# EAGLE board EC544 (EAGLE 9.6.2)
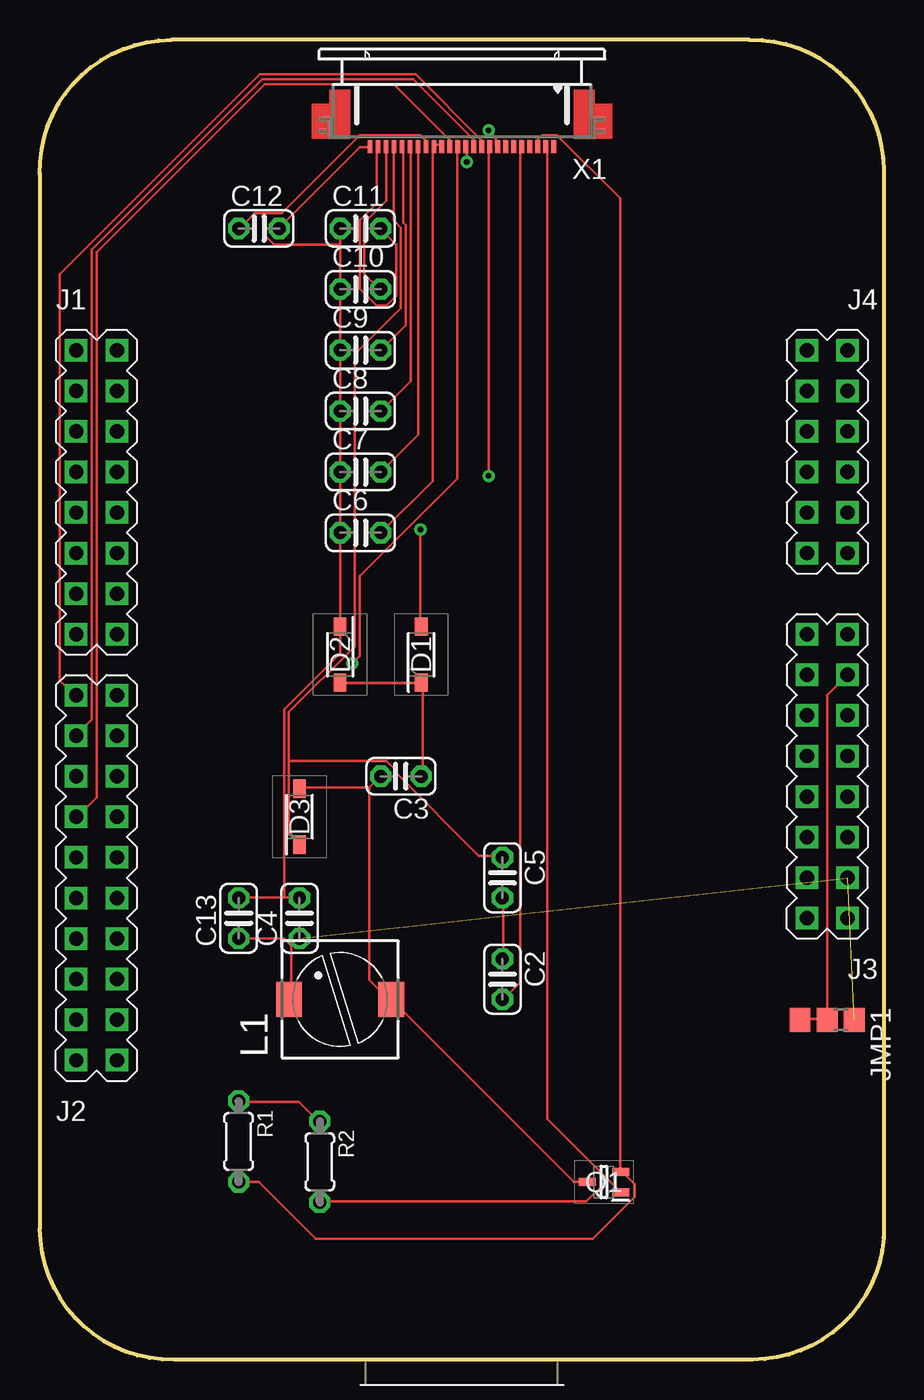
[diagram p0: board, top side]
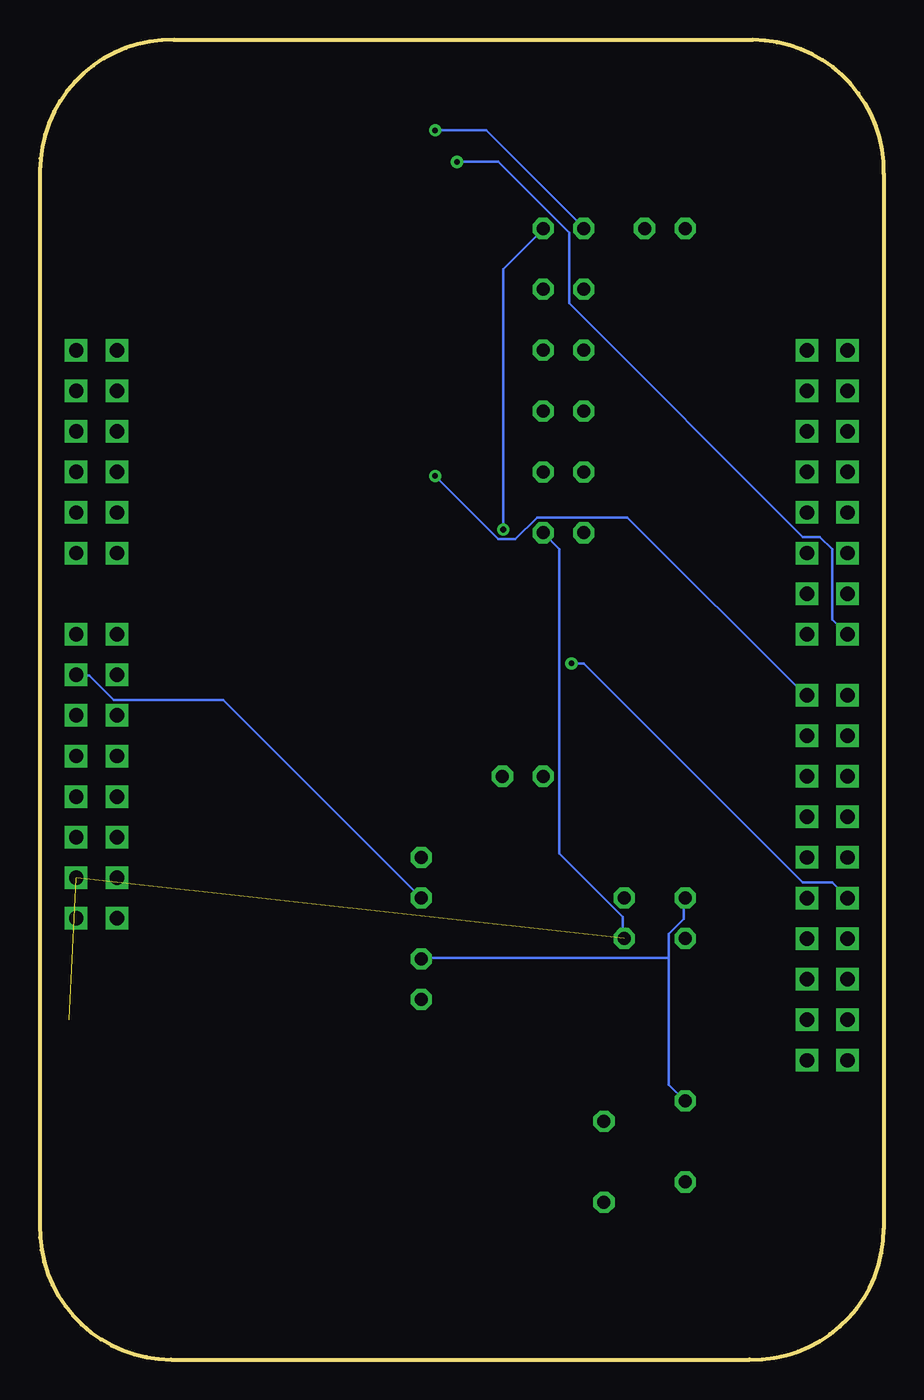
[diagram p1: board, bottom side, seen from below]

Size 52.8 x 82.6 mm. Coordinates in mm from the lower left corner, seen from the top.
Copper layers (1*16): Top 0.035mm / dielectric 1.5mm / Bottom 0.035mm
Design rules "default": minimum track width 6mil, minimum drill 0.35mm, track to track 6mil, track to pad 6mil, pad to pad 6mil, via to via 6mil, smd to smd 6mil, copper to edge 40mil, drill to drill 6mil, minimum pad ring 10mil, minimum via ring 8mil, stop-mask expansion 4mil, vias tented up to drill 0mil, thermal gap 10mil

## Footprints (pad centres in the part's own frame; a part is rotated, then mirrored left to right if it is on the bottom)
C025-024X044 = drill 0.813 octagon: 1 -1.27,0; 2 1.27,0
SOD3716X135N = smd 1.15 x 0.8: 1 -1.75,0; 2 1.75,0
FRDM_K64F = drill 0.9 square: J1.1 -21.59,17.78; J1.2 -24.13,17.78; J1.3 -21.59,15.24; J1.4 -24.13,15.24; J1.5 -21.59,12.7; J1.6 -24.13,12.7; J1.7 -21.59,10.16; J1.8 -24.13,10.16; J1.9 -21.59,7.62; J1.10 -24.13,7.62; J1.11 -21.59,5.08; J1.12 -24.13,5.08; J1.13 -21.59,2.54; J1.14 -24.13,2.54; J1.15 -21.59,0; J1.16 -24.13,0; J2.1 -21.59,-3.81; J2.2 -24.13,-3.81; J2.3 -21.59,-6.35; J2.4 -24.13,-6.35; J2.5 -21.59,-8.89; J2.6 -24.13,-8.89; J2.7 -21.59,-11.43; J2.8 -24.13,-11.43; J2.9 -21.59,-13.97; J2.10 -24.13,-13.97; J2.11 -21.59,-16.51; J2.12 -24.13,-16.51; J2.13 -21.59,-19.05; J2.14 -24.13,-19.05; J2.15 -21.59,-21.59; J2.16 -24.13,-21.59; J2.17 -21.59,-24.13; J2.18 -24.13,-24.13; J2.19 -21.59,-26.67; J2.20 -24.13,-26.67; J3.1 21.59,-17.78; J3.2 24.13,-17.78; J3.3 21.59,-15.24; J3.4 24.13,-15.24; J3.5 21.59,-12.7; J3.6 24.13,-12.7; J3.7 21.59,-10.16; J3.8 24.13,-10.16; J3.9 21.59,-7.62; J3.10 24.13,-7.62; J3.11 21.59,-5.08; J3.12 24.13,-5.08; J3.13 21.59,-2.54; J3.14 24.13,-2.54; J3.15 21.59,0; J3.16 24.13,0; J4.1 21.59,5.08; J4.2 24.13,5.08; J4.3 21.59,7.62; J4.4 24.13,7.62; J4.5 21.59,10.16; J4.6 24.13,10.16; J4.7 21.59,12.7; J4.8 24.13,12.7; J4.9 21.59,15.24; J4.10 24.13,15.24; J4.11 21.59,17.78; J4.12 24.13,17.78
A0R-JMP = smd 1.5 x 1.3: 1 0,1.7; 2 0,0; 3 0,-1.7
PIS2816 = smd 2.2 x 1.6: 1 0,3.2; 2 0,-3.2
SOT65P210X110-3N = smd 1.05 x 0.5: 1 -1.05,0.65; 2 -1.05,-0.65; 3 1.05,0
0204/5 = drill 0.813 octagon: 1 -2.54,0; 2 2.54,0
52745-2490 = smd 0.3 x 0.8: 1 -5.75,2.5; 2 -5.25,2.5; 3 -4.75,2.5; 4 -4.25,2.5; 5 -3.75,2.5; 6 -3.25,2.5; 7 -2.75,2.5; 8 -2.25,2.5; 9 -1.75,2.5; 10 -1.25,2.5; 11 -0.75,2.5; 12 -0.25,2.5; 13 0.25,2.5; 14 0.75,2.5; 15 1.25,2.5; 16 1.75,2.5; 17 2.25,2.5; 18 2.75,2.5; 19 3.25,2.5; 20 3.75,2.5; 21 4.25,2.5; 22 4.75,2.5; 23 5.25,2.5; 24 5.75,2.5

## Placement (x,y rotation side)
C2  [C025-024X044]  28.94,23.81 270 top
C3  [C025-024X044]  22.59,36.51 180 top
C4  [C025-024X044]  16.24,27.62 90 top
C5  [C025-024X044]  28.94,30.16 270 top
C6  [C025-024X044]  20.05,51.75 0 top
C7  [C025-024X044]  20.05,55.56 0 top
C8  [C025-024X044]  20.05,59.37 0 top
C9  [C025-024X044]  20.05,63.18 0 top
C10  [C025-024X044]  20.05,66.99 0 top
C11  [C025-024X044]  20.05,70.8 0 top
C12  [C025-024X044]  13.7,70.8 0 top
C13  [C025-024X044]  12.43,27.62 90 top
D1  MBR0530  [SOD3716X135N]  23.86,44.13 90 top
D2  MBR0530  [SOD3716X135N]  18.78,44.13 270 top
D3  MBR0530  [SOD3716X135N]  16.24,33.97 90 top
FRDM1  [FRDM_K64F]  26.4,45.4 0 top
JMP1  0R-JUMPA  [A0R-JMP]  49.26,21.27 270 top
L1  [PIS2816]  18.78,22.54 90 top
Q1  SI1308EDL-T1-GE3  [SOT65P210X110-3N]  35.29,11.11 180 top
R1  [0204/5]  12.43,13.65 270 top
R2  [0204/5]  17.51,12.38 270 top
X1  52745-2490  [52745-2490]  26.4,78.42 180 top

## Library data of the parts
C2-C13 = rcl; SPICEPREFIX: C
D1-D3 = MBR0530; ARROW_PART_NUMBER: MBR0530; ARROW_PRICE-STOCK: https://www.arrow.com/en/products/mbr0530/on-semiconductor?region=nac; DESCRIPTION: ON SEMICONDUCTOR - MBR0530 - DIODE, SCHOTTKY, 0.5A, 30V, SOD-123; HEIGHT: 1.35mm; MANUFACTURER_NAME: ON Semiconductor; MANUFACTURER_PART_NUMBER: MBR0530; MOUSER_PART_NUMBER: 512-MBR0530; MOUSER_PRICE-STOCK: https://www.mouser.co.uk/ProductDetail/ON-Semiconductor-Fairchild/MBR0530?qs=VOMQJJE%252BBNniwJKcE3T43Q%3D%3D
FRDM1 = Freedom
JMP1 = jump-0r-smd
L1 = rcl; SPICEPREFIX: L
Q1 = Si1308EDL-T1-GE3; ARROW_PART_NUMBER: SI1308EDL-T1-GE3; ARROW_PRICE-STOCK: https://www.arrow.com/en/products/si1308edl-t1-ge3/vishay?region=nac; DESCRIPTION: MOSFET N-Ch 30V 1.5A TrenchFET SC70 Vishay Si1308EDL-T1-GE3 N-channel MOSFET Transistor, 1.5 A, 30 V, 3-Pin SC-70; HEIGHT: 1.1mm; MANUFACTURER_NAME: Vishay; MANUFACTURER_PART_NUMBER: Si1308EDL-T1-GE3; MOUSER_PART_NUMBER: 78-SI1308EDL-T1-GE3; MOUSER_PRICE-STOCK: https://www.mouser.co.uk/ProductDetail/Vishay-Semiconductors/SI1308EDL-T1-GE3?qs=bX1%252BNvsK%2FBramh9tgpOaEw%3D%3D
R1 R2 = rcl; SPICEPREFIX: R
X1 = con-molex; MF: MOLEX; OC_FARNELL: unknown; OC_NEWARK: unknown

## Nets
0: C2.1 C4.2 C5.2 C6.1 C7.1 C8.1 C9.1 C10.1 C11.1 C12.1 C13.2 D2.1 FRDM1.J3.14 JMP1.2 JMP1.3 R1.1 R2.1 X1.8 X1.17
N$1: C2.2 X1.5
N$2: C4.1 C6.2 C13.1 FRDM1.J3.4 JMP1.1 L1.1 X1.15 X1.16
N$3: C3.1 D1.1 D2.2
N$4: C7.2 X1.18
N$5: C9.2 X1.20
N$6: C10.2 X1.22
N$7: C11.2 D1.2 X1.23
N$8: C12.2 X1.24
N$9: C3.2 D3.2 L1.2 Q1.3
N$10: C5.1 D3.1 X1.21
N$11: Q1.1 R2.2 X1.2
N$12: Q1.2 R1.2 X1.3
N$14: FRDM1.J2.1 X1.9
N$16: FRDM1.J2.2 X1.10
N$17: FRDM1.J2.4 X1.11
N$18: FRDM1.J1.16 X1.12
N$19: FRDM1.J2.12 X1.13
N$20: FRDM1.J2.8 X1.14
N$21: C8.2 X1.19

## Tracks (layer width: path | path; a pad name or v marks a point on that pad's centre or on a via)
0  (via drill 0.35)
  Top 0.152: 14.06,71.76 13.45,71.76 12.53,70.85 C12.1 | 14.06,71.76 15.12,71.76 20,76.64 23.81,76.64 24.11,76.34 24.11,76.03 X1.17 | v28.08,76.95 28.53,76.49 28.53,76.03 X1.8 | 18.78,69.78 C10.1 C9.1 C8.1 C7.1 C6.1 D2.1 18.78,44.18 15.27,40.68 15.27,28.94 | 18.78,69.78 C11.1 | 14.06,71.76 14.06,70.39 14.66,69.78 18.78,69.78 | 49.26,21.32 47.58,21.32 JMP1.3 | 49.26,21.32 49.26,41.59 FRDM1.J3.14 | 49.26,21.32 JMP1.2 | C2.1 28.99,25.13 28.99,28.79 C5.2 | 15.27,28.94 16.19,28.94 C4.2 | 15.27,28.94 12.53,28.94 C13.2 | R1.1 12.53,16.14 16.19,16.14 17.41,14.92 R2.1
  Bottom 0.152: v28.08,76.95 24.88,76.95 18.78,70.85 C11.1 | 13.45,25.13 13.45,17.21 R1.1 | 13.45,25.13 13.45,26.66 12.53,27.57 12.53,28.79 C13.2 | 13.45,25.13 28.84,25.13 C2.1 | C5.2 41.33,41.28 48.19,41.28 49.72,42.81 50.48,42.81 FRDM1.J3.14
N$1
  Top 0.152: X1.5 30.06,75.88 30.06,23.61 28.99,22.54 C2.2
N$2  (2 unrouted)
  Top 0.152: 15.73,25.89 15.73,22.54 L1.1 | 15.73,25.89 16.19,26.35 C4.1 | C13.1 15.27,26.35 15.73,25.89 | X1.15 25.03,76.03 24.72,76.03 X1.16 24.57,75.88 24.57,55 C6.2
  Bottom 0.152: C6.2 20.3,50.73 20.3,31.68 16.34,27.72 16.34,26.35 C4.1
N$3
  Top 0.152: D2.2 18.78,42.35 23.81,42.35 D1.1 23.96,42.35 23.96,36.56 C3.1
N$4
  Top 0.152: C7.2 23.66,57.9 23.66,75.88 X1.18
N$5
  Top 0.152: C9.2 22.89,64.75 22.89,71 22.74,71.16 22.74,75.88 X1.20
N$6
  Top 0.152: X1.22 21.68,75.88 21.68,72.53 20.3,71.16 20.3,67.96 21.22,67.04 C10.2
N$7  (via drill 0.35)
  Top 0.152: X1.23 21.07,75.88 21.07,72.38 20,71.31 20,67.04 21.07,65.97 21.68,65.97 22.28,66.58 22.28,69.78 21.37,70.7 C11.2 | v23.81,51.95 23.81,46.01 D1.2
  Bottom 0.152: v23.81,51.95 23.81,68.26 21.37,70.7 C11.2
N$8
  Top 0.152: X1.24 20.61,75.88 20,75.88 14.97,70.85 C12.2
N$9
  Top 0.152: 20.61,35.8 16.34,35.8 D3.2 | C3.2 20.61,35.8 | Q1.3 33.41,11.11 L1.2 | L1.2 | 20.61,35.8 20.61,23.76 21.83,22.54 L1.2
N$10
  Top 0.152: 15.58,37.48 15.58,32.9 16.19,32.29 D3.1 | 15.58,37.48 15.58,40.52 19.69,44.64 19.69,62.93 22.59,65.82 22.59,70.85 22.13,71.31 22.13,75.88 X1.21 | 15.58,37.48 21.68,37.48 22.28,36.87 22.28,36.71 27.47,31.53 28.84,31.53 C5.1
N$11
  Top 0.152: 35.54,11.26 36.31,10.5 Q1.1 | 35.54,11.26 31.73,15.07 31.73,75.88 X1.2 | 35.54,11.26 34.17,9.89 17.56,9.89 R2.2
N$12
  Top 0.152: X1.3 31.12,76.03 31.12,76.34 31.43,76.64 32.34,76.64 36.31,72.68 36.31,11.87 Q1.2 36.46,11.72 37.22,10.96 37.22,10.2 34.58,7.55 17.26,7.55 13.7,11.11 R1.2
N$14  (via drill 0.35)
  Top 0.152: v28.08,55.31 28.08,75.88 X1.9
  Bottom 0.152: v28.08,55.31 24.11,51.34 23.05,51.34 21.68,52.71 16.04,52.71 4.91,41.59 FRDM1.J2.1
N$16
  Top 0.152: X1.10 27.62,76.03 27.62,76.34 23.5,80.45 13.75,80.45 1.25,67.96 1.25,42.5 2.17,41.59 FRDM1.J2.2
N$17
  Top 0.152: X1.11 27.16,76.03 27.16,76.34 23.35,80.15 13.9,80.15 3.23,69.48 3.23,40.07 2.32,39.15 FRDM1.J2.4
N$18  (via drill 0.35)
  Top 0.152: v26.7,74.97 26.7,75.88 X1.12
  Bottom 0.152: v26.7,74.97 24.11,74.97 19.69,70.55 19.69,66.13 5.06,51.5 4,51.5 3.23,50.73 3.23,46.31 2.32,45.4 FRDM1.J1.16
N$19  (via drill 0.35)
  Top 0.152: v19.54,43.57 20,44.03 20,49.06 26.09,55.15 26.09,75.88 X1.13
  Bottom 0.152: v19.54,43.57 18.78,43.57 5.06,29.86 3.23,29.86 FRDM1.J2.12
N$20
  Top 0.152: X1.14 25.64,76.03 25.64,76.34 22.13,79.84 14.06,79.84 3.54,69.33 3.54,35.19 2.32,33.97 FRDM1.J2.8
N$21
  Top 0.152: C8.2 23.2,61.25 23.2,75.88 X1.19